# EAGLE board first schematic (EAGLE 9.6.2)
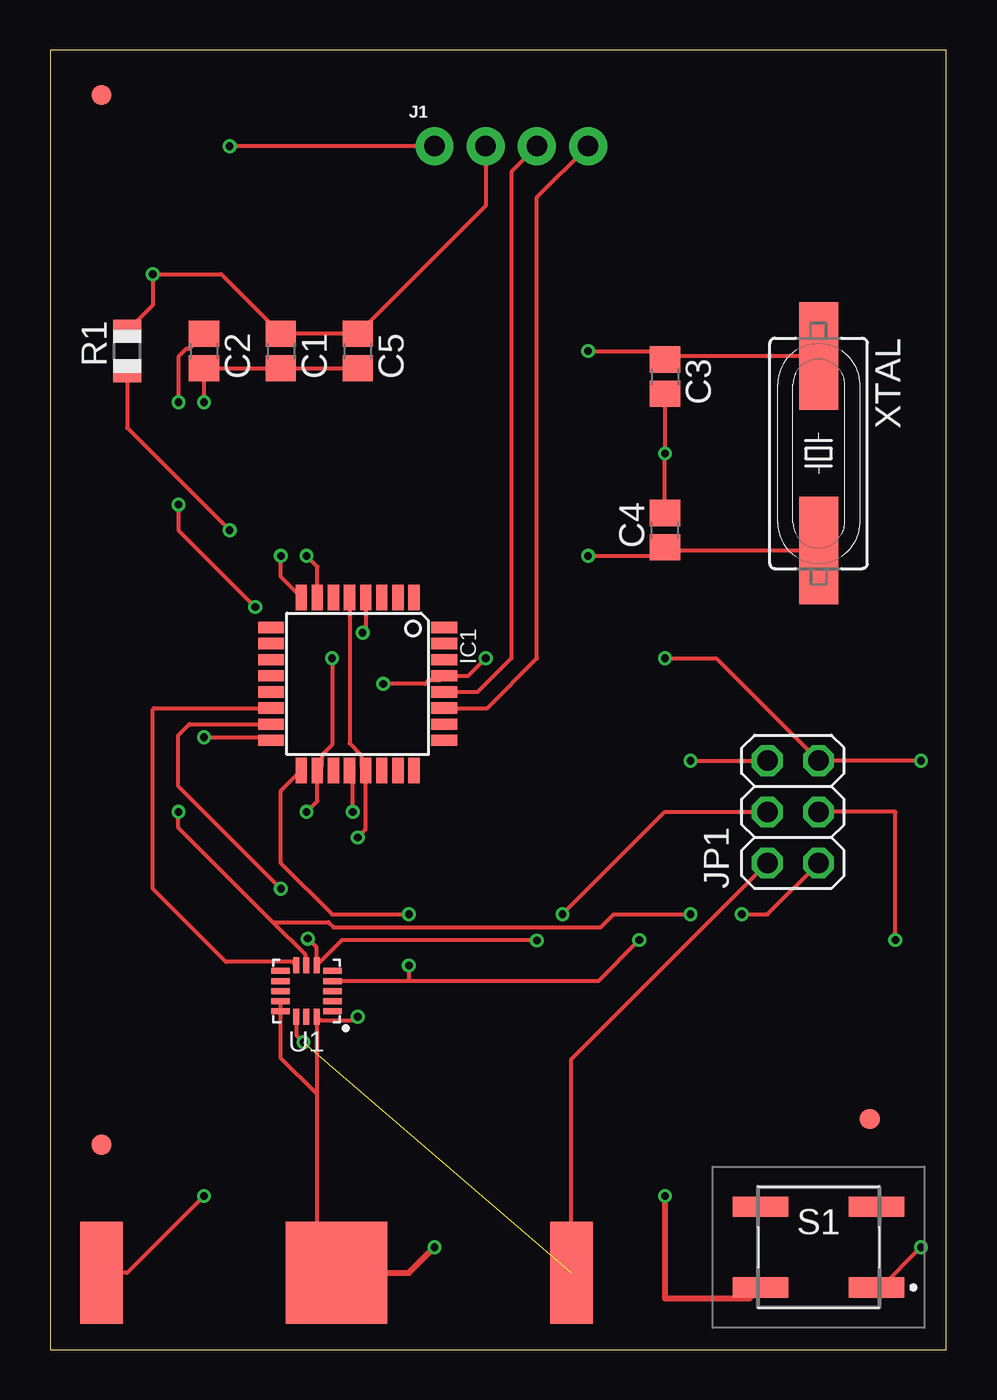
[diagram p0: board, top side]
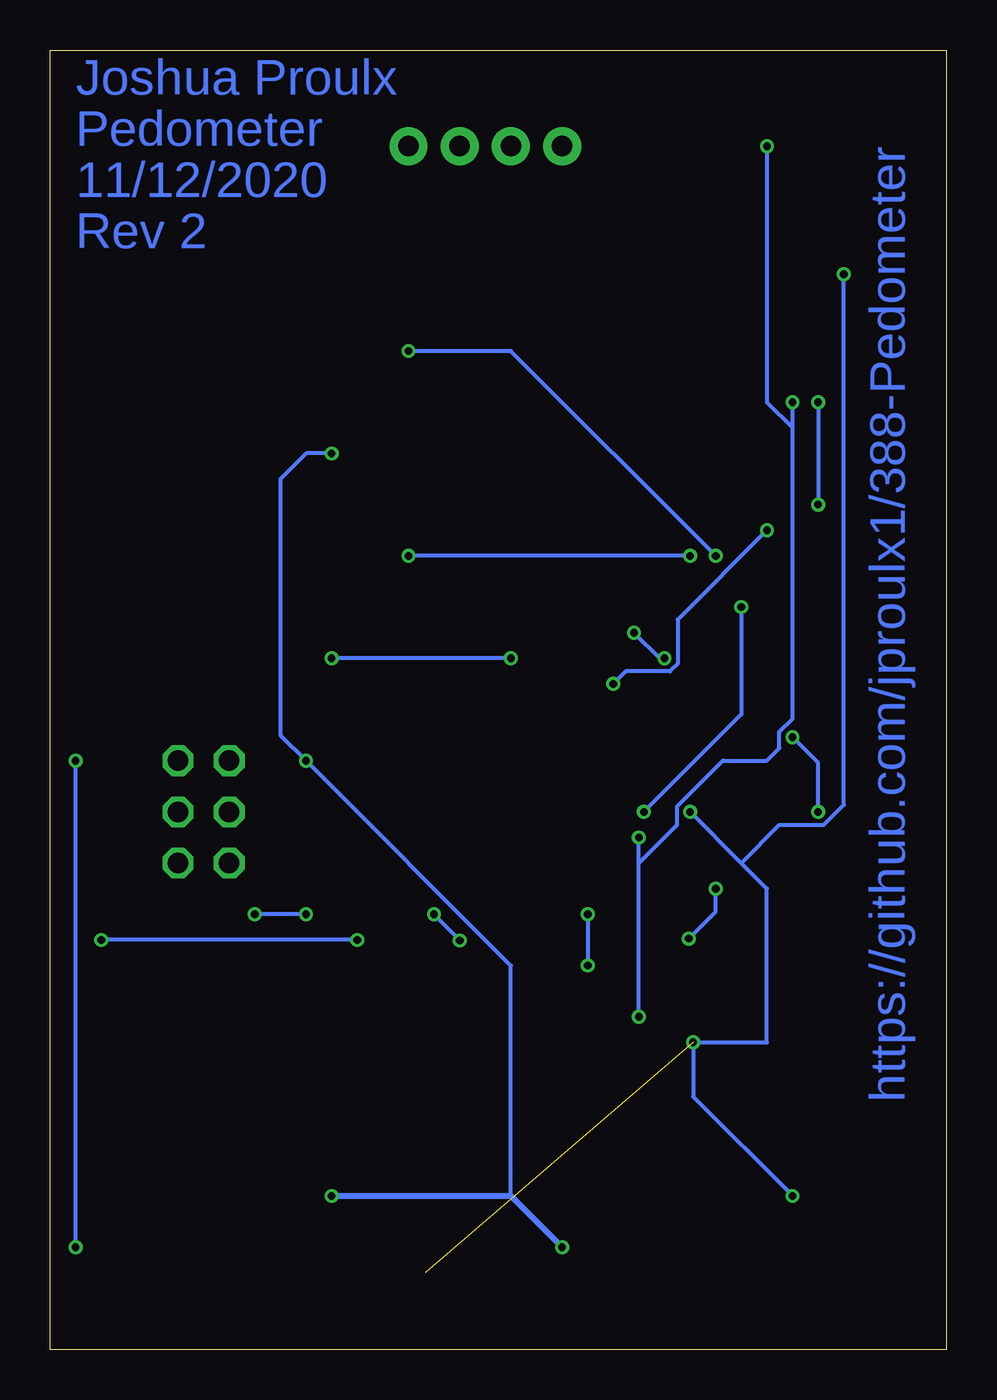
[diagram p1: board, bottom side, seen from below]

Size 44.43 x 64.44 mm. Coordinates in mm from the lower left corner, seen from the top.
Outline: 0,0 44.43,0 44.43,64.44 0,64.44 0,0
Copper layers (1*16): Top 0.035mm / dielectric 1.5mm / Bottom 0.035mm
Design rules "Dirty8TS": minimum track width 8mil, minimum drill 15mil, track to track 8mil, track to pad 8mil, pad to pad 8mil, via to via 8mil, smd to smd 0mil, copper to edge 10mil, drill to drill 10mil, minimum pad ring 10mil, minimum via ring 6mil, stop-mask expansion 2mil, vias tented up to drill 25mil, thermal gap 10mil

## Footprints (pad centres in the part's own frame; a part is rotated, then mirrored left to right if it is on the bottom)
C0805 = smd 1.3 x 1.5: 1 -0.85,0; 2 0.85,0
TQFP32-08 = smd 1.27 x 0.559: 1 -4.293,2.8; 2 -4.293,2; 3 -4.293,1.2; 4 -4.293,0.4; 5 -4.293,-0.4; 6 -4.293,-1.2; 7 -4.293,-2; 8 -4.293,-2.8; 17 4.293,-2.8; 18 4.293,-2; 19 4.293,-1.2; 20 4.293,-0.4; 21 4.293,0.4; 22 4.293,1.2; 23 4.293,2; 24 4.293,2.8 | smd 0.559 x 1.27: 9 -2.8,-4.293; 10 -2,-4.293; 11 -1.2,-4.293; 12 -0.4,-4.293; 13 0.4,-4.293; 14 1.2,-4.293; 15 2,-4.293; 16 2.8,-4.293; 25 2.8,4.293; 26 2,4.293; 27 1.2,4.293; 28 0.4,4.293; 29 -0.4,4.293; 30 -1.2,4.293; 31 -2,4.293; 32 -2.8,4.293
1X04_NO_SILK = drill 1.016 pad 1.88: 1 0,0; 2 2.54,0; 3 5.08,0; 4 7.62,0
2X03 = drill 1.016 octagon: 1 -2.54,-1.27; 2 -2.54,1.27; 3 0,-1.27; 4 0,1.27; 5 2.54,-1.27; 6 2.54,1.27
R0805 = smd 1.1 x 1.4: 1 -1,0; 2 1,0
EVPBFAC1A000 = smd 2.75 x 1: A1 2.875,-2; A2 -2.875,-2; B1 2.875,2; B2 -2.875,2
TFLGA-16/3.3MMX3.1MM = smd 0.925 x 0.3: 1 -1.288,1; 2 -1.288,0.5; 3 -1.288,0; 4 -1.288,-0.5; 5 -1.288,-1; 9 1.288,-1; 10 1.288,-0.5; 11 1.288,0; 12 1.288,0.5; 13 1.288,1 | smd 0.3 x 0.8: 6 -0.5,-1.275; 7 0,-1.275; 8 0.5,-1.275; 14 0.5,1.275; 15 0,1.275; 16 -0.5,1.275
FIDUCIAL_1MM = smd 1 x 1: 1 0,0
CR2032 = smd 5.05 x 5.05: GRND 11.65,0 | smd 2.1 x 5.05: VCC 23.3,0; VCC2 0,0
HC49UP = smd 5.334 x 1.93: 1 -4.826,0; 2 4.826,0

## Placement (x,y rotation side)
C1  100nF  [C0805]  11.43,49.53 270 top
C2  100nF  [C0805]  7.62,49.53 270 top
C3  20pF  [C0805]  30.48,48.26 270 top
C4  20pF  [C0805]  30.48,40.64 90 top
C5  1uF  [C0805]  15.24,49.53 270 top
IC1  ATMEGA328P  [TQFP32-08]  15.24,33.02 270 top
J1  [1X04_NO_SILK]  19.05,59.69 0 top
JP1  PINHD-2X3  [2X03]  36.83,26.67 90 top
R1  10K  [R0805]  3.81,49.53 90 top
S1  EVP-BFAC1A000  [EVPBFAC1A000]  38.1,5.08 0 top
U1  ADXL362  [TFLGA-16/3.3MMX3.1MM]  12.7,17.78 180 top
U$1  FIDUCIAL  [FIDUCIAL_1MM]  2.54,62.23 0 top
U$2  FIDUCIAL  [FIDUCIAL_1MM]  2.54,10.16 0 top
U$3  FIDUCIAL  [FIDUCIAL_1MM]  40.64,11.43 0 top
U$4  CR2032  [CR2032]  2.54,3.81 0 top
XTAL  16MHz  [HC49UP]  38.1,44.45 270 top

## Library data of the parts
C1-C5 R1 U$1-U$3 = adafruit
IC1 = IC_Embedded; CATEGORY: IC_Embedded; MANUFACTURER: Microchip; MPN: ATMEGA328PB-AN; OPERATING_TEMP: -40 to 105°C; PART_STATUS: Active; ROHS_COMPLIANT: Compliant; SUB-CATEGORY: Microcontroller
J1 = SparkFun-Connectors; PROD_ID: CONN-09696
JP1 = Connector; CATEGORY: CONNECTOR; SUB-CATEGORY: PIN-HEADER
S1 = EVP-BFAC1A000; AVAILABILITY: Warning; DESCRIPTION: Tactile Switch SPST-NO Top Actuated Surface Mount; MF: Panasonic Electronic; MP: EVP-BFAC1A000; PACKAGE: None; PRICE: None; PURCHASE-URL: https://pricing.snapeda.com/search/part/EVP-BFAC1A000/?ref=eda
U1 = ADXL362; AVAILABILITY: Bad; DESCRIPTION: Accelerometer X, Y, Z Axis ±2g, 4g, 8g 6.25Hz ~ 400Hz 16-LGA (3x3.25); MF: Analog Devices; MP: ADXL362; PACKAGE: LGA-16 Analog Devices; PRICE: None
U$4 = cr2032
XTAL = adafruit; OC_FARNELL: unknown; OC_NEWARK: unknown

## Nets
AREFTOCAP: C2.1 IC1.20
GRND: C1.2 C2.2 C3.2 C4.2 C5.2 IC1.5 IC1.21 J1.1 JP1.6 S1.A2 U1.12 U1.13 U1.16 U$4.GRND
N$2: C4.1 IC1.7 XTAL.2
N$3: IC1.15 JP1.4 U1.6
N$5: IC1.16 JP1.1 U1.7
N$6: IC1.17 JP1.3 U1.4
N$7: IC1.29 JP1.5 R1.1 S1.A1
N$8: C3.1 IC1.8 XTAL.1
N$9: IC1.28 J1.3
N$10: IC1.27 J1.4
N$14: IC1.14 U1.8
VCC: C1.1 C5.1 IC1.4 IC1.18 J1.2 JP1.2 R1.2 U1.14 U$4.VCC U$4.VCC2

## Tracks (layer width: path | path; a pad name or v marks a point on that pad's centre or on a via)
AREFTOCAP  (via drill 0.38)
  Top 0.203: C2.1 6.88,49.63 6.74,49.63 6.35,49.24 v6.35,46.99 | v10.16,36.83 6.35,40.64 v6.35,41.91 | v14.99,26.67 14.99,28.57 IC1.20
  Bottom 0.203: v10.16,36.83 10.16,31.5 v14.99,26.67 | v6.35,46.99 v6.35,41.91
GRND  (via drill 0.38)
  Top 0.203: C3.2 v30.48,44.45 C4.2 | v31.75,29.21 JP1.6 | 13.2,12.7 U1.16 13.22,16.5 13.4,16.32 15.05,16.32 v15.24,16.51 | 13.2,12.7 13.2,4.8 U$4.GRND | U1.12 U1.13 11.41,14.49 13.2,12.7 | v15.24,25.4 15.64,25.8 IC1.21 15.42,28.94 15.42,29.49 14.84,30.07 IC1.5 | C5.2 C1.2 C2.2 v7.62,46.99 | J1.1 v8.89,59.69
  Top 0.305: v19.05,5.08 17.78,3.81 U$4.GRND | v30.48,7.62 30.48,2.54 34.69,2.54 S1.A2
  Bottom 0.203: v30.48,44.45 31.75,44.45 33.02,43.18 33.02,30.48 v31.75,29.21 21.59,19.05 21.59,7.62 | v15.24,16.51 15.24,24.13 | 15.24,24.13 v15.24,25.4 | 15.24,24.13 13.35,26.02 13.35,26.94 11.08,29.21 8.89,29.21 8.27,29.83 8.27,30.64 7.62,31.29 7.62,45.72 | 7.62,45.72 v7.62,46.99 | v8.89,59.69 8.89,46.99 7.62,45.72
  Bottom 0.305: v19.05,5.08 21.59,7.62 v30.48,7.62
N$2  (via drill 0.38)
  Top 0.203: XTAL.2 30.65,39.62 | 30.65,39.62 C4.1 | IC1.7 13.24,38.83 v12.7,39.37 | v26.67,39.37 30.39,39.37 30.65,39.62
  Bottom 0.203: v12.7,39.37 v26.67,39.37
N$3  (via drill 0.38)
  Top 0.203: IC1.15 6.89,31.02 6.35,30.48 6.35,27.94 v11.43,22.86 | v12.77,20.39 13.2,19.95 U1.6 14.46,20.32 24.11,20.32 v24.13,20.3 | v25.4,21.59 30.48,26.67 JP1.4
  Bottom 0.203: v12.77,20.39 11.43,21.72 v11.43,22.86 | v24.13,20.3 25.4,21.57 v25.4,21.59
N$5  (via drill 0.38)
  Top 0.203: U1.7 12.65,19.1 12.65,19.58 11.04,21.2 | v7.62,30.37 10.79,30.37 IC1.16 | v6.35,26.67 6.35,25.89 11.04,21.2 | 11.04,21.2 13.79,21.2 14.04,20.94 27.29,20.94 27.94,21.59 v31.75,21.59 | v34.29,21.59 35.56,21.59 JP1.1
  Bottom 0.203: v6.35,26.67 6.35,29.1 v7.62,30.37 | v31.75,21.59 v34.29,21.59
N$6  (via drill 0.38)
  Top 0.203: IC1.17 11.43,27.72 11.43,24.13 13.97,21.59 v17.78,21.59 | 17.78,18.28 27.17,18.28 v29.21,20.32 | v41.91,20.32 41.91,26.67 JP1.3 | v17.78,19.05 17.78,18.28 | 17.78,18.28 U1.4
  Bottom 0.203: v29.21,20.32 v41.91,20.32 | v17.78,21.59 v17.78,19.05
N$7  (via drill 0.38)
  Top 0.203: S1.A1 41.18,3.08 v43.18,5.08 | v43.18,29.21 JP1.5 33.02,34.29 v30.48,34.29 | v21.59,34.29 20.72,33.42 IC1.29 19.32,33.2 18.77,33.2 18.59,33.02 v16.51,33.02 | R1.1 3.81,45.72 v8.89,40.64
  Bottom 0.203: v43.18,5.08 v43.18,29.21 | v21.59,34.29 v30.48,34.29 | v8.89,40.64 13.32,36.21 13.32,34.02 13.7,33.64 15.89,33.64 v16.51,33.02
N$8  (via drill 0.38)
  Top 0.203: XTAL.1 30.65,49.28 C3.1 30.06,49.53 v26.67,49.53 | IC1.8 11.43,38.32 v11.43,39.37
  Bottom 0.203: v11.43,39.37 21.59,49.53 v26.67,49.53
N$9
  Top 0.203: IC1.28 21.19,32.62 22.86,34.29 22.86,58.42 J1.3
N$10
  Top 0.203: IC1.27 21.66,31.82 24.13,34.29 24.13,57.15 J1.4
N$14
  Top 0.203: IC1.14 5.15,31.82 5.08,31.75 5.08,22.86 8.71,19.23 12,19.23 12.18,19.05 U1.8
VCC  (via drill 0.38)  (1 unrouted)
  Top 0.203: U1.14 12.2,15.59 v12.55,15.24 | v7.62,7.62 3.81,3.81 U$4.VCC2 | U$4.VCC 25.84,14.41 JP1.2 | v12.7,26.67 13.24,27.21 IC1.18 13.46,28.94 13.46,29.49 13.97,30 v13.97,34.29 | R1.2 5.08,51.8 v5.08,53.34 8.47,53.34 C1.1 C5.1 21.59,56.73 J1.2 | IC1.4 15.64,35.71 v15.49,35.56
  Bottom 0.203: v7.62,7.62 12.55,12.55 v12.55,15.24 8.89,15.24 8.89,22.86 10.16,24.13 | 10.16,24.13 v12.7,26.67 | 10.16,24.13 8.27,26.02 6.08,26.02 5.08,27.02 v5.08,53.34 | v15.49,35.56 14.22,34.29 v13.97,34.29

## Text on the board
Bottom: Joshua Proulx | https://github.com/jproulx1/388-Pedometer | Pedometer | 11/12/2020 | Rev 2